# Altium PCB GWC-MCU-002-A.PcbDoc (part 2 of 2)
Units mm, origin at the board's own origin, x right, y up, seen from the top; angles counter-clockwise.
Board outline 121 x 53 mm, 2 copper layers (Top Layer, Bottom Layer), stack 1.601 mm thick; 192 components, 111 nets, 570 pads, 192 vias.
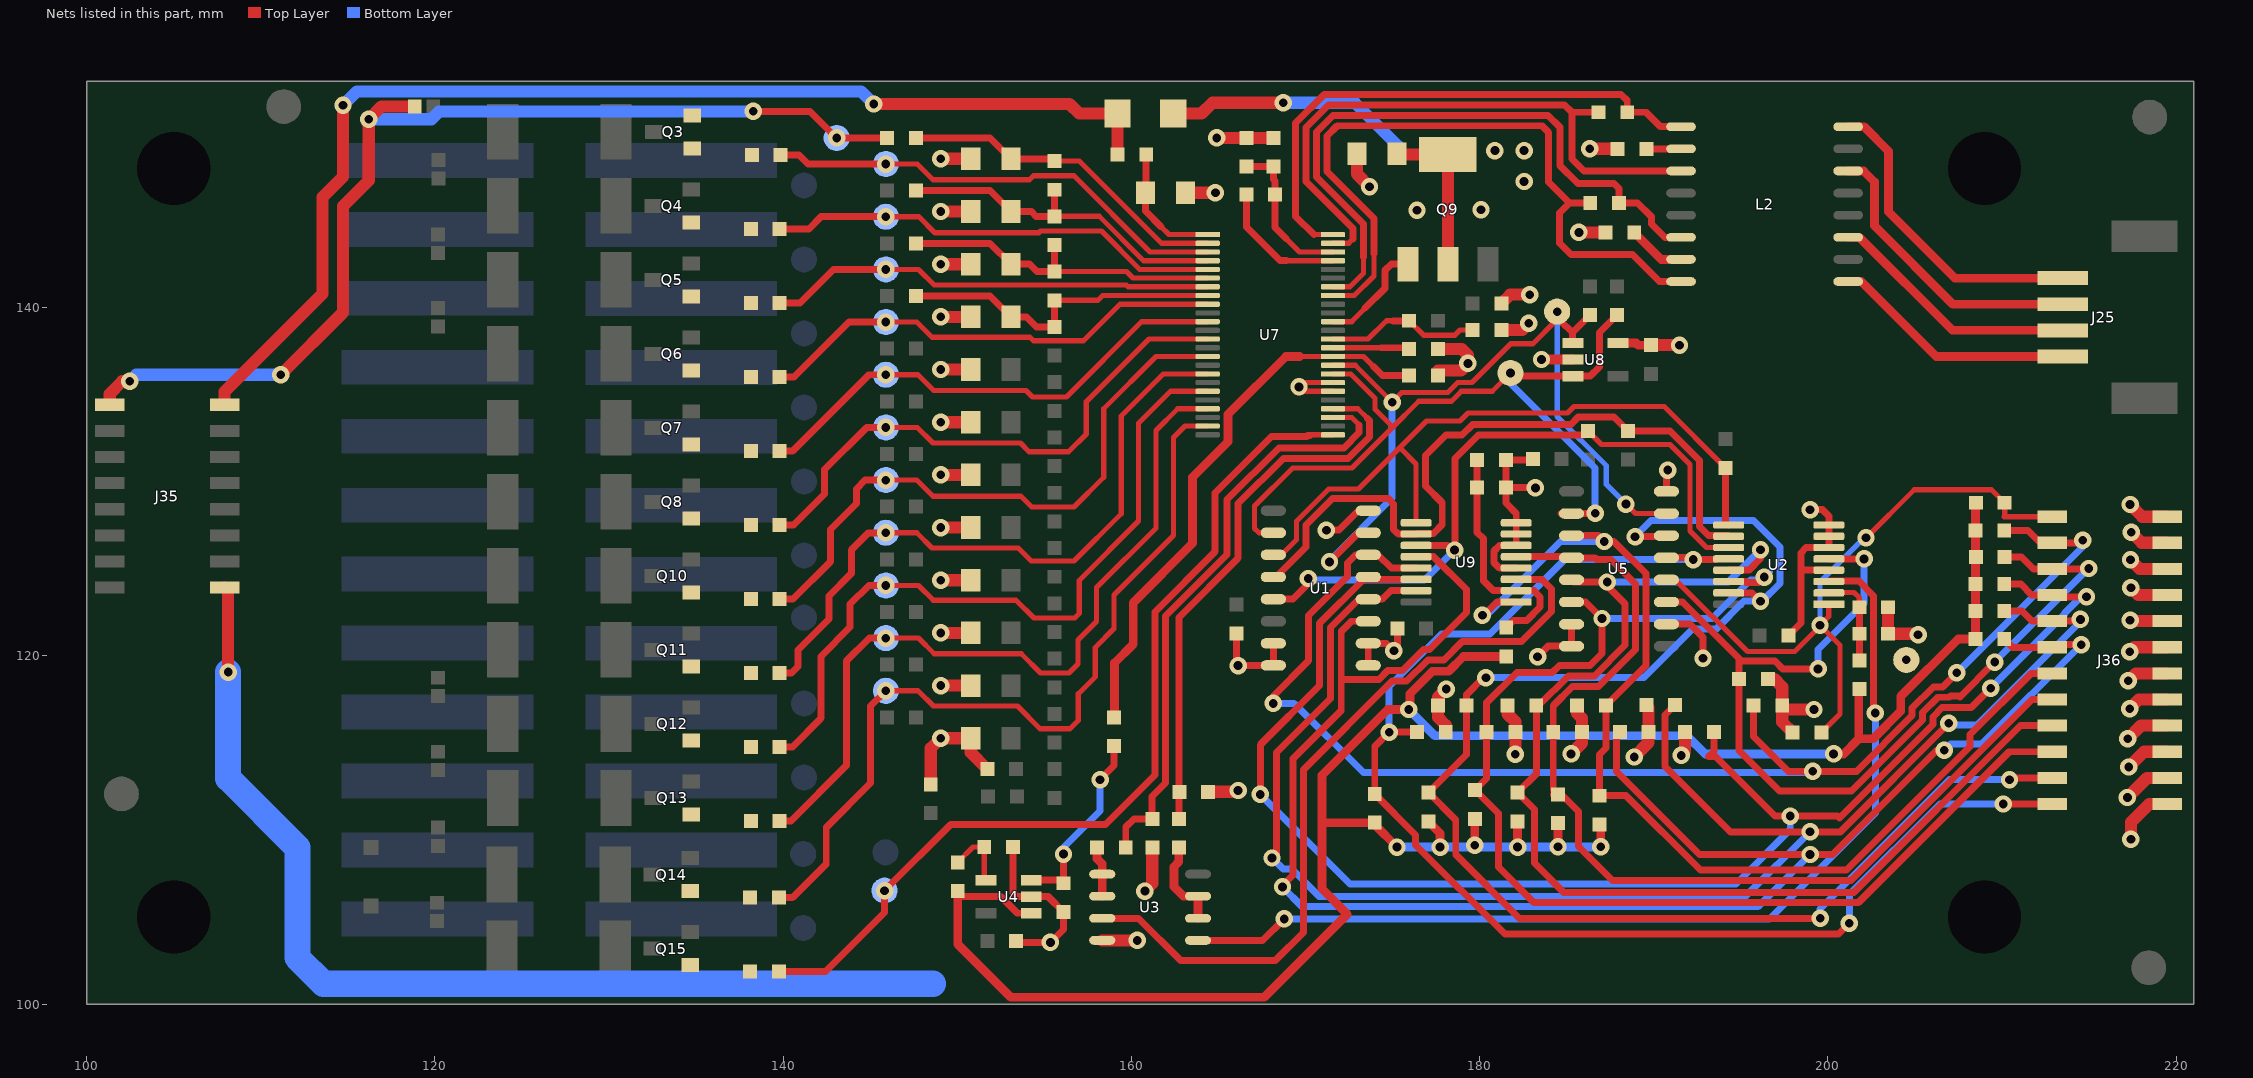
[diagram p2: the nets of this part, all layers, seen from the top]

## Via types
v1: diameter 1, hole 0.5, Top Layer to Bottom Layer, 192 vias

## Nets (pads, with @x,y where several pads share a name; then routed paths per layer and width w, separated by ;. In a path a pad name is that pad's centre, name@x,y a point inside that pad or via, vN(x,y) a via of type N, cw(c..) or ccw(c..) an arc to the next point about the centre after c; other vN are vias at no path point) (continued)
CELL9_AI_V_MX: C14.1 C15.2 C27.2 R33.2 U7.8 | length 19.1
  Top Layer w0.3: C14.1@155.575,140.425 158.075,140.425 158.35,140.7 U7.8@164.375,140.7
  Top Layer w0.4: R33.2@147.625,140.675 151.875,140.675 C27.2@153.075,139.475 153.975,139.475 154.55,138.9 C15.2@155.575,138.9 C14.1@155.575,140.425
CELL10_AI_V_MX: C13.1 C14.2 C24.2 R29.2 U7.6 | length 19.1
  Top Layer w0.3: C14.2@155.575,142.075 159.725,142.075 160.1,141.7 U7.6@164.375,141.7
  Top Layer w0.4: R29.2@147.625,143.7 151.875,143.7 C24.2@153.075,142.5 154.15,142.5 154.575,142.075 C14.2@155.575,142.075 C13.1@155.575,143.6
CELL11_AI_V_MX: C12.1 C13.2 C23.2 R25.2 U7.4 | length 19.9
  Top Layer w0.3: C13.2@155.575,145.25 158.15,145.25 160.7,142.7 U7.4@164.375,142.7
  Top Layer w0.4: R25.2@147.625,146.725 151.875,146.725 C23.2@153.075,145.525 154.25,145.525 154.525,145.25 C13.2@155.575,145.25 C12.1@155.575,146.775
CELL12_AI_V_IB: B12.1 J27.1 J35.2 Q3.S R21.1 | length 61.2
  Top Layer w0.4: v1(138.275,151.275) 141.55,151.275 v1(143.075,149.75) R21.1@145.975,149.75
  Top Layer w0.7: J35.2@101.325,134.425 101.325,135.05 102.05,135.775 v1(102.475,135.775) ; v1(111.15,136.15) 114.725,139.725 114.725,145.825 116.2,147.3 v1(116.2,150.825) 116.925,151.55 J27.1@118.845,151.55
  Bottom Layer w0.7: v1(102.475,135.775) 102.85,136.15 v1(111.15,136.15) ; v1(116.2,150.825) 119.8,150.825 120.25,151.275 v1(138.275,151.275)
CELL12_AI_V_MX: C12.2 C22.2 R21.2 U7.2 | length 19.3
  Top Layer w0.3: C12.2@155.575,148.425 157,148.425 161.725,143.7 U7.2@164.375,143.7
  Top Layer w0.4: R21.2@147.625,149.75 151.875,149.75 C22.2@153.075,148.55 155.45,148.55 C12.2@155.575,148.425
CELL12_POWER: J35.1 R18.2 R35.1 | length 67.7
  Top Layer w0.7: J35.1@107.925,134.425 107.925,135.175 113.55,140.8 113.55,146.35 114.725,147.525 v1(114.725,151.625) ; v1(145.2,151.7) 156.45,151.7 157,151.15 R35.1@159.2,151.15 R18.2@159.2,148.8
  Bottom Layer w0.7: v1(114.725,151.625) 115.525,152.425 144.475,152.425 v1(145.2,151.7)
DC1_DO_V_DX: F1.1 R88.2 U7.25 | length 52.8
  Top Layer w0.3: 170.2,132.65 170.25,132.7 U7.25@171.575,132.7
  Top Layer w0.4: R88.2@139.75,101.875 142.425,101.875 145.825,105.275 v1(145.825,106.525) 149.625,110.325 158.5,110.325 161.35,113.175 161.35,122.536 164.801,125.987 164.801,129.351 168.05,132.6 170.074,132.6 170.124,132.65 170.2,132.65 170.25,132.65
DC2_DO_V_DX: F2.1 R83.2 U7.23 | length 47.8
  Top Layer w0.3: v1(145.9,118) 147.75,118 148.625,117.125 153.45,117.125 154.75,115.825 156.475,115.825 156.95,116.3 156.95,117.825 157.925,118.8 157.925,120.495 159,121.57 159,123.509 162.412,126.922 162.412,132.538 163.075,133.2 U7.23@164.375,133.2
  Top Layer w0.4: R83.2@139.75,106.125 140.55,106.125 142.475,108.05 142.475,110.15 145.025,112.7 145.025,117.125 v1(145.9,118)
DC3_DO_V_DX: F3.1 R79.2 U7.21 | length 44.8
  Top Layer w0.3: v1(145.9,121.025) 147.775,121.025 148.675,120.125 153.675,120.125 154.775,119.025 156.418,119.025 156.925,119.532 156.925,120.909 158,121.984 158,123.923 161.412,127.336 161.412,132.952 162.661,134.2 U7.21@164.375,134.2
  Top Layer w0.4: R79.2@139.8,110.525 140.45,110.525 143.625,113.7 143.625,119.7 144.95,121.025 v1(145.9,121.025)
DC4_DO_V_DX: F4.1 R72.2 U7.19 | length 41.9
  Top Layer w0.3: v1(145.9,124.05) 147.775,124.05 148.625,123.2 153.375,123.2 154.4,122.175 156.743,122.175 157,122.432 157,124.338 160.412,127.75 160.412,133.366 162.246,135.2 U7.19@164.375,135.2
  Top Layer w0.4: R72.2@139.8,114.775 140.525,114.775 142.175,116.425 142.175,119.978 143.85,121.653 143.85,122.975 144.925,124.05 v1(145.9,124.05)
DC5_DO_V_DX: F5.1 R62.2 U7.17 | length 38.4
  Top Layer w0.3: v1(145.9,127.075) 147.675,127.075 148.55,126.2 153.5,126.2 154.25,125.45 156.698,125.45 159.412,128.164 159.412,133.78 161.832,136.2 U7.17@164.375,136.2
  Top Layer w0.4: R62.2@139.8,119.025 140.475,119.025 140.85,119.4 140.85,120.35 142.625,122.125 142.625,123.447 143.913,124.735 143.913,126.088 144.9,127.075 v1(145.9,127.075)
DC6_DO_V_DX: F6.1 R56.2 U7.15 | length 35.5
  Top Layer w0.3: v1(145.9,130.1) 147.675,130.1 148.6,129.175 153.65,129.175 154.275,128.55 156.7,128.55 158.413,130.263 158.413,134.195 161.418,137.2 U7.15@164.375,137.2
  Top Layer w0.4: R56.2@139.8,123.275 140.575,123.275 142.713,125.413 142.713,127.263 144.2,128.75 144.2,129.6 144.7,130.1 v1(145.9,130.1)
DC7_DO_V_DX: F7.1 R49.2 U7.13 | length 32.8
  Top Layer w0.3: v1(145.9,133.125) 147.7,133.125 148.6,132.225 153.625,132.225 154.125,131.725 156.393,131.725 157.413,132.745 157.413,134.609 161.004,138.2 U7.13@164.375,138.2
  Top Layer w0.4: R49.2@139.8,127.525 140.6,127.525 142.375,129.3 142.375,130.7 144.8,133.125 v1(145.9,133.125) 145.175,133.125
DC8_DO_V_DX: F8.1 R45.2 U7.11 | length 28.7
  Top Layer w0.3: v1(145.9,136.15) 147.75,136.15 148.65,135.25 153.95,135.25 154.325,134.875 156.264,134.875 160.589,139.2 U7.11@164.375,139.2
  Top Layer w0.4: R45.2@139.8,131.775 140.55,131.775 144.925,136.15 v1(145.9,136.15)
DC9_DO_V_DX: F9.1 R39.2 U7.9 | length 27.2
  Top Layer w0.3: v1(145.9,139.175) 147.675,139.175 148.55,138.3 154.175,138.3 154.375,138.1 157.25,138.1 159.35,140.2 U7.9@164.375,140.2
  Top Layer w0.4: R39.2@139.8,136.025 140.625,136.025 143.775,139.175 v1(145.9,139.175)
DC10_DO_V_DX: F10.1 R32.2 U7.7 | length 25.8
  Top Layer w0.3: v1(145.9,142.2) 147.775,142.2 148.675,141.3 159.7,141.3 159.8,141.2 U7.7@164.375,141.2
  Top Layer w0.4: R32.2@139.8,140.275 140.975,140.275 142.9,142.2 v1(145.9,142.2)
DC11_DO_V_DX: F11.1 R28.2 U7.5 | length 26.2
  Top Layer w0.3: v1(145.9,145.225) 147.8,145.225 148.725,144.3 154.675,144.3 154.775,144.4 158.275,144.4 160.475,142.2 U7.5@164.375,142.2
  Top Layer w0.4: R28.2@139.8,144.525 141.475,144.525 142.175,145.225 v1(145.9,145.225)
DC12_DO_V_DX: F12.1 R24.2 U7.3 | length 27
  Top Layer w0.3: v1(145.9,148.25) 147.7,148.25 148.6,147.35 154.15,147.35 154.375,147.575 156.7,147.575 161.075,143.2 U7.3@164.375,143.2
  Top Layer w0.4: R24.2@139.85,148.775 140.9,148.775 141.425,148.25 v1(145.9,148.25)
GND: C1.1 C2.1 C3.1 C4.1 C5.1 C6.1 C7.1 C8.1 C9.2 C10.2 C11.1 C21.2 C22.1 C23.1 C24.1 C25.1 C26.1 C27.1 C28.1 C29.1 C30.1 C31.1 C33.2 C35.1 C36.1 C37.1 C38.1 C39.1 C40.2 C41.1 C42.1 C43.1 C44.1 C45.1 C46.1 C47.1 C48.1 C49.2 C50.1 C51.1 C53.2 C54.2 C55.2 GND.1 J35.15 J36.2 J36.4 J36.6 J36.8 J36.10 J36.12 J36.14 J36.16 J36.18 J36.20 J36.22 J36.24 R3.1 R4.1 R7.1 R14.1 R19.2 R20.2 R60.1 U1.7 U1.8 U1.9 U1.10 U1.16 U2.4 U2.6 U2.7 U2.8 U3.4 U4.2 U5.7 U5.8 U5.10 U5.16 U7.30 U7.31 U8.2 U8.5 U9.4 U9.6 U9.7 U9.8 | length 227.2
  Top Layer w0.3: U7.30@171.575,135.2 169.875,135.2 v1(169.625,135.45) 169.875,135.7 U7.31@171.575,135.7
  Top Layer w0.4: R19.2@153.2,109.025 153.2,106.375 153.4,106.175 U4.2@154.25,106.175 155.225,106.175 C53.2@156.1,105.3 156.1,104.3 v1(155.35,103.55) 153.45,103.55 C54.2@153.375,103.625 ; C55.2@166.025,121.3 166.025,119.56 v1@166.13,119.455 ; v1(166.125,119.45) v1@166.13,119.455 ; U1.7@168.15,120.725 U1.8@168.15,119.455 v1@166.13,119.455 ; v1(171.2,127.225) 171.914,127.225 173.034,128.345 U1.16@173.6,128.345 ; U1.9@173.6,119.455 U1.10@173.6,120.725 174.65,120.725 v1(175.075,120.3) 175.275,120.5 C40.2@175.275,121.575 ; U9.4@182.1,125.05 181.125,125.05 180.81,125.365 180.81,126.014 181.146,126.35 U9.6@182.1,126.35 U9.7@182.1,127 U9.8@182.1,127.65 182.1,128.175 181.5,128.775 C1.1@181.5,129.675 ; C21.2@183,131.25 R14.1@181.5,131.25 C1.1@181.5,129.675 ; v1(183.2,129.65) 183.175,129.675 C1.1@181.5,129.675 ; v1(183.325,119.95) 183.935,120.56 U5.8@185.275,120.56 U5.7@185.275,121.83 ; U5.10@190.725,121.83 192.07,121.83 192.825,121.075 v1(192.825,119.875) ; U5.16@190.725,129.45 190.725,130.6 v1(190.8,130.675) ; C9.2@197.725,121.175 198.45,121.9 198.45,125.925 198.75,126.225 U2.6@200.05,126.225 U2.7@200.05,126.875 U2.8@200.05,127.525 200.05,128.025 199.675,128.4 v1(198.975,128.4) ; 198.45,124.925 U2.4@200.05,124.925
  Top Layer w0.5: U8.5@187.95,137.975 188.975,137.975 189.1,137.85 C33.2@189.85,137.85
  Top Layer w0.6: v1(183.55,137.025) U8.2@185.35,137.025
  Top Layer w0.7: J35.15@107.925,123.925 108.125,123.725 v1(108.125,119.075) ; R20.2@148.475,112.625 148.475,114.7 v1(149.05,115.275) C50.1@150.775,115.275 150.775,114.45 C51.1@151.725,113.5 ; v1(149.05,118.3) C48.1@150.775,118.3 ; v1(149.05,121.325) C41.1@150.775,121.325 ; v1(149.05,124.35) C39.1@150.775,124.35 ; v1(149.05,127.375) C38.1@150.775,127.375 ; v1(149.05,130.4) C31.1@150.775,130.4 ; v1(149.05,133.425) C29.1@150.775,133.425 ; v1(149.05,136.45) C28.1@150.775,136.45 ; v1(149.05,139.475) C27.1@150.775,139.475 ; v1(149.05,142.5) C24.1@150.775,142.5 ; v1(149.05,145.525) C23.1@150.775,145.525 ; v1(149.05,148.55) C22.1@150.775,148.55 ; U3.4@158.325,103.665 v1(160.34,103.665) ; v1(160.775,106.5) 161.2,106.925 C49.2@161.2,109 ; C11.1@163.1,146.6 v1(164.825,146.6) ; C10.2@164.4,112.2 166.05,112.2 v1(166.125,112.275) ; v1(164.9,149.75) R3.1@166.6,149.75 R4.1@168.15,149.75 ; C30.1@172.95,148.85 172.95,147.675 v1(173.675,146.95) ; C35.1@177.6,136.1 177.6,136.4 178.925,136.4 v1(179.325,136.8) 179.325,137.275 178.975,137.625 C36.1@177.6,137.625 ; C43.1@178.05,115.625 178.05,116.025 177.6,116.475 C44.1@177.6,117.15 177.6,117.625 v1(178.075,118.1) ; R60.1@181.25,138.725 182.45,138.725 v1(182.825,139.1) ; C37.1@181.25,140.25 181.75,140.75 v1(182.875,140.75) ; C46.1@181.6,117.15 181.6,116.675 182.05,116.225 C45.1@182.05,115.625 v1(182.05,114.35) ; v1(185.25,114.375) 185.875,115 C47.1@185.875,115.625 185.875,116.425 185.6,116.7 C3.1@185.6,117.15 ; v1(185.7,144.325) C26.1@187.225,144.325 ; v1(186.325,149.125) C25.1@187.925,149.125 ; v1(188.875,114.2) 189.7,115.025 C4.1@189.7,115.625 189.7,117.05 C5.1@189.575,117.175 ; C33.2@189.85,137.85 v1(191.475,137.85) ; v1(191.575,114.289) 191.8,114.514 C6.1@191.8,115.625 ; C2.1@196.55,118.675 196.925,118.675 197.375,118.225 C7.1@197.375,117.15 ; C42.1@197.975,115.6 197.375,116.2 C7.1@197.375,117.15 ; v1(199.2,116.925) 197.6,116.925 C7.1@197.375,117.15 ; R7.1@203.45,122.8 C8.1@203.45,121.275 205.125,121.275 v1(205.175,121.225) ; v1(217.2,111.875) 218.325,113 J36.4@219.475,113 ; v1(217.225,115.25) 217.975,116 J36.8@219.475,116 ; v1(217.25,118.575) 217.675,119 J36.12@219.475,119 ; v1(217.275,113.625) 218.15,114.5 J36.6@219.475,114.5 ; v1(217.325,116.975) 217.85,117.5 J36.10@219.475,117.5 ; v1(217.325,120.25) 217.575,120.5 J36.14@219.475,120.5 ; v1(217.35,122.05) 217.4,122 J36.16@219.475,122 ; v1(217.35,128.7) 218.05,128 J36.24@219.475,128 ; v1(217.375,125.525) 217.9,125 J36.20@219.475,125 ; v1(217.4,109.475) 217.4,110.45 218.45,111.5 J36.2@219.475,111.5 ; v1(217.4,123.925) 217.825,123.5 J36.18@219.475,123.5 ; v1(217.425,127.1) 218.025,126.5 J36.22@219.475,126.5
  Bottom Layer w0.4: v1(175.075,120.3) v1@175.1,120.3 ; v1(198.975,128.4) 199.05,128.4 v1@199.225,128.225
  Bottom Layer w1.5: v1(108.125,119.075) 108.125,112.975 112.1,109 112.1,102.675 113.6,101.175 148.6,101.175
  other v1: 204.5,119.775
IMA: J25.1 L2.1 | length 14.1
  Top Layer w0.5: L2.1@201.162,141.504 201.921,141.504 206.225,137.2 J25.1@213.475,137.2
IMB: J25.3 L2.6 | length 17
  Top Layer w0.5: L2.6@201.162,147.854 202.046,147.854 202.675,147.225 202.675,144.7 207.175,140.2 J25.3@213.475,140.2
IPA: J25.2 L2.3 | length 14.5
  Top Layer w0.5: L2.3@201.162,144.044 201.806,144.044 207.15,138.7 J25.2@213.475,138.7
IPB: J25.4 L2.8 | length 17.9
  Top Layer w0.5: L2.8@201.162,150.394 202.081,150.394 203.483,148.992 203.483,145.517 207.3,141.7 J25.4@213.475,141.7
NetC1_2: C1.2 R1.1 R14.2 U9.2 | length 13.8
  Top Layer w0.4: R14.2@179.85,131.25 C1.2@179.85,129.675 179.85,127.102 180.21,126.742 180.21,124.319 180.779,123.75 U9.2@182.1,123.75 183.116,123.75 183.475,123.391 183.475,122.809 182.716,122.05 181.95,122.05 R1.1@181.525,121.625
NetC8_2: C8.2 R7.2 R13.1 U2.2 | length 6.1
  Top Layer w0.3: U2.2@199.375,123.65 201.5,123.65 201.8,123.35 R7.2@201.8,122.8
  Top Layer w0.4: R13.1@201.8,119.75 C8.2@201.8,121.275 R7.2@201.8,122.8
NetC11_2: C11.2 R18.1 U7.1 | length 7.4
  Top Layer w0.3: 161.7,144.65 162.15,144.2 U7.1@164.375,144.2
  Top Layer w0.4: R18.1@160.85,148.8 160.85,146.65 C11.2@160.8,146.6 160.8,145.55 161.7,144.65
NetC25_2: C25.2 L2.10 | length 2
  Top Layer w0.4: C25.2@189.575,149.125 L2.10@191.561,149.125
NetC26_2: C26.2 L2.15 | length 3.3
  Top Layer w0.5: C26.2@188.876,144.324 190.426,142.774 L2.15@191.562,142.774
NetC30_2: C30.2 Q9.C R35.2 | length 23.5
  Top Layer w0.7: R35.2@162.4,151.15 164.025,151.15 164.65,151.775 v1(168.725,151.775) ; C30.2@175.225,148.8 Q9.C@178.175,148.8 Q9.C@178.175,142.5
  Bottom Layer w0.7: v1(168.725,151.775) 172.825,151.775 175.325,149.275
  other v1: 176.4,145.6 180.075,145.625 182.55,147.25 180.875,149.025 182.55,149.025
NetC53_1: C53.1 R16.2 U4.3 | length 11
  Top Layer w0.4: U4.3@154.25,107.125 155.925,107.125 C53.1@156.1,106.95 v1(156.1,108.625) ; v1(158.2,112.9) 159,113.7 R16.2@159,114.825
  Bottom Layer w0.4: v1(156.1,108.625) 156.1,109 158.2,111.1 v1(158.2,112.9)
NetL2_9: L2.9 R36.1 U7.48 | length 31.9
  Top Layer w0.3: 170.475,144.2 U7.48@171.575,144.2
  Top Layer w0.4: 170.475,144.2 169.425,145.25 169.425,150.6 171.075,152.25 188.125,152.25 188.475,151.9 R36.1@188.475,151.225 189.55,151.225 190.381,150.394 L2.9@191.562,150.394
NetL2_11: L2.11 R36.2 U7.47 | length 35.5
  Top Layer w0.3: U7.47@171.575,143.7 172.475,143.7 172.725,143.95
  Top Layer w0.4: 172.725,143.95 172.725,144.55 170.025,147.25 170.025,150.351 171.324,151.65 184.875,151.65 185.3,151.225 ; R36.2@186.825,151.225 185.3,151.225 ; L2.11@191.562,147.854 185.996,147.854 185.3,148.55 185.3,151.225
NetL2_14: L2.14 R37.1 U7.42 | length 37.6
  Top Layer w0.3: U7.42@171.575,141.2 172.55,141.2 173.325,141.975 173.325,142.925
  Top Layer w0.4: 173.325,142.925 173.325,144.799 170.625,147.499 170.625,150.103 171.572,151.05 183.925,151.05 184.6,150.375 184.6,148.175 185.65,147.125 187.725,147.125 188,146.85 R37.1@188,146.025 189.075,146.025 189.875,145.225 189.875,144.8 190.631,144.044 L2.14@191.562,144.044
NetL2_16: L2.16 R37.2 U7.41 | length 41.3
  Top Layer w0.3: U7.41@171.575,140.7 172.8,140.7 173.925,141.825 173.925,143.1
  Top Layer w0.4: 173.925,143.1 173.925,145.125 171.225,147.825 171.225,149.854 171.821,150.45 183.575,150.45 183.95,150.075 183.95,147.225 185.15,146.025 ; R37.2@186.35,146.025 185.15,146.025 ; L2.16@191.562,141.504 190.325,141.504 188.779,143.05 185.25,143.05 184.575,143.725 184.575,145.45 185.15,146.025
NetQ3_G: Q3.G R24.1
NetQ4_G: Q4.G R28.1
NetQ5_G: Q5.G R32.1
NetQ6_G: Q6.G R39.1
NetQ7_G: Q7.G R45.1
NetQ8_G: Q8.G R49.1
NetQ9_B: Q9.B U7.38 | length 6.3
  Top Layer w0.3: U7.38@171.575,139.2 172.65,139.2 173.425,139.975
  Top Layer w0.4: 173.425,139.975 174.55,141.1 174.55,142.125 174.925,142.5 Q9.B@175.875,142.5
NetQ10_G: Q10.G R56.1
NetQ11_G: Q11.G R62.1
NetQ12_G: Q12.G R72.1
NetQ13_G: Q13.G R79.1
NetQ14_G: Q14.G R83.1
NetQ15_G: Q15.G R88.1
NetR3_2: R3.2 R4.2 R42.2 U7.46 | length 9
  Top Layer w0.3: 168.875,143.975 169.65,143.2 U7.46@171.575,143.2
  Top Layer w0.4: R3.2@166.6,148.1 R4.2@168.15,148.1 168.15,147.375 168.25,147.275 R42.2@168.25,146.5 168.25,144.6 168.875,143.975
NetR15_2: R15.2 U1.5 U2.11 U9.11 | length 40.8
  Top Layer w0.3: R15.2@186.225,132.925 187,132.15 190.925,132.15 192.075,131 192.075,127.175 193.025,126.225 U2.11@194.3,126.225
  Top Layer w0.4: U1.5@168.15,123.265 169.282,123.265 170.15,124.133 v1(170.15,124.45) ; U9.11@176.35,126.35 178.153,126.35 178.421,126.081 v1(178.559,126.081) ; v1@178.575,126.081 178.575,131.341 179.934,132.7 186,132.7 R15.2@186.225,132.925
  Bottom Layer w0.4: v1(170.15,124.45) 170.235,124.365 176.843,124.365 v1(178.559,126.081)
NetR17_2: R17.2 U3.6 U3.7 | length 5.2
  Top Layer w0.5: R17.2@162.725,109 162.725,108.175 162.45,107.9 162.45,106.75 162.995,106.205 U3.7@163.825,106.205 U3.6@163.825,104.935
NetR19_1: R19.1 R23.1 U4.4 | length 3.8
  Top Layer w0.3: R23.1@150.025,108.15 150.9,109.025 R19.1@151.55,109.025 151.55,107.225 U4.4@151.65,107.125
NetR42_1: R42.1 U7.45 | length 7.6
  Top Layer w0.3: 168.9,142.7 U7.45@171.575,142.7
  Top Layer w0.4: R42.1@166.6,146.5 166.6,144.625 168.525,142.7 168.9,142.7
NetR53_2: R53.2 R60.2 U7.36 | length 8.9
  Top Layer w0.3: U7.36@171.575,138.2 173.593,138.2 174.643,139.25 175.025,139.25 ; R53.2@175.95,139.25 176.775,138.425 178.575,138.425 178.875,138.725 R60.2@179.6,138.725
  Top Layer w0.4: 175.025,139.25 R53.2@175.95,139.25
NetR76_2: R76.2 U1.4 U2.10 U9.10 | length 42
  Top Layer w0.4: U1.4@168.15,124.535 168.295,124.535 170.025,126.265 170.025,127.514 171.556,129.045 174.755,129.045 175.06,128.74 175.06,127.265 175.325,127 U9.10@176.35,127 176.39,127.04 177.344,127.04 177.85,127.546 177.85,128.8 176.9,129.75 176.9,131.525 178.063,132.688 178.988,132.688 179.6,133.3 185.234,133.3 185.659,133.725 187.725,133.725 R76.2@188.525,132.925 190.928,132.925 192.625,131.228 192.625,127.425 193.135,126.915 194.26,126.915 U2.10@194.3,126.875
NetR77_1: R77.1 U1.3 U2.9 U9.9 | length 39.6
  Top Layer w0.3: U1.3@168.15,125.805 168.605,125.805 169.475,126.675 169.475,127.742 171.328,129.595 173.045,129.595 176.95,133.5 178.875,133.5 179.325,133.95 185.036,133.95 185.411,134.325 190.6,134.325 R77.1@194.125,130.8 ; 175.438,131.938 176.35,131.025 U9.9@176.35,127.65
  Top Layer w0.4: R77.1@194.125,130.8 194.125,127.7 U2.9@194.3,127.525
NetR85_2: R85.2 U3.1 U3.2 | length 2.9
  Top Layer w0.5: R85.2@158.025,109 158.025,108.35 158.325,108.05 U3.1@158.325,107.475 U3.2@158.325,106.205
NetU2_3: U2.3 U3.5 | length 57.4
  Top Layer w0.4: U3.5@163.825,103.665 167.54,103.665 v1(168.775,104.9) ; U2.3@200.05,124.3 201.775,124.3 202.625,123.45 202.625,116.825 v1(202.725,116.725)
  Bottom Layer w0.4: v1(168.775,104.9) 196.653,104.9 202.725,110.972 v1(202.725,116.725)
NetU3_3: U3.3 U9.3 | length 44.1
  Top Layer w0.4: U3.3@158.325,104.935 160.415,104.935 162.825,102.525 168.275,102.525 169.875,104.125 169.875,113.467 174.968,118.56 175.806,118.56 177.021,119.775 177.95,119.775 179,120.825 182.4,120.825 184.125,122.55 184.125,123.85 183.575,124.4 U9.3@182.1,124.4
SCL: R6.1 SCL.1 U1.15 U5.15 U7.33 U8.1 | length 47.9
  Top Layer w0.3: U7.33@171.575,136.7 172.85,136.7 v1(174.975,134.575) 175.525,135.125 178.165,135.125 178.74,135.7 179.55,135.7 181.775,137.925 183.05,137.925 184.45,139.325 v1(184.45,139.775) ; v1(188.4,128.725) 188.945,128.18 U5.15@190.725,128.18
  Top Layer w0.4: v1(171.375,125.4) 173.05,127.075 U1.15@173.6,127.075 ; SCL.1@184.651,139.249 185.325,138.575 ; U8.1@185.325,138 185.325,138.575 ; R6.1@186.325,139.575 185.325,138.575
  Bottom Layer w0.3: v1(184.45,139.775) 184.45,133.753 187.275,130.928 187.275,129.85 v1(188.4,128.725)
  Bottom Layer w0.4: v1(171.375,125.4) 171.375,125.461 174.975,129.061 v1(174.975,134.575)
SDA: R5.1 SDA.1 U1.2 U5.2 U7.32 U8.3 | length 46.6
  Top Layer w0.3: U1.2@168.475,127.075 167.325,127.075 167.075,127.325 167.075,128.614 169.261,130.8 172.673,130.8 174.962,133.088 ; U7.32@171.575,136.2 172.593,136.2 173.99,134.803 173.99,134.167 174.962,133.195 174.962,133.088 ; v1(181.775,136.25) 180.725,135.2 178.947,135.2 178.372,134.625 176.498,134.625 174.962,133.088
  Top Layer w0.4: v1(181.775,136.25) 181.95,136.075 183.943,136.075 U8.3@185.35,136.075 186.35,136.075 186.875,136.6 186.875,138.575 R5.1@187.875,139.575 ; U5.2@184.675,128.195 v1(186.63,128.195)
  Bottom Layer w0.4: v1(181.775,136.25) 181.775,135.65 186.63,130.795 v1(186.63,128.195)
TEMP1_AI_C_MX: C49.1 R85.1 U7.27 | length 34.3
  Top Layer w0.3: U7.27@171.575,133.7 172.65,133.7 173.075,133.275
  Top Layer w0.4: R85.1@159.675,109 159.675,110.175 160.15,110.65 C49.1@161.2,110.65 161.175,110.675 161.175,111.925 161.95,112.7 161.95,122.287 165.501,125.838 165.501,128.976 168.475,131.95 172.197,131.95 173.075,132.828 173.075,133.275
TEMP2_AI_C_MX: C10.1 R17.1 U7.28 | length 32
  Top Layer w0.3: U7.28@171.575,134.2 173.001,134.2 173.551,133.65
  Top Layer w0.4: R17.1@162.725,110.65 162.725,122.214 166.125,125.614 166.125,128.751 168.724,131.35 172.445,131.35 173.675,132.58 173.675,133.526 173.551,133.65
TEMPA_AI_C_IB: C7.2 J36.21 R12.1 U1.14 U9.13 | length 79.3
  Top Layer w0.4: v1(168.15,117.275) 168.15,117.7 170.175,119.725 170.175,122.325 172.41,124.56 172.41,125.335 172.88,125.805 U1.14@173.6,125.805 174.17,125.805 174.925,125.05 U9.13@176.35,125.05 ; C7.2@195.725,117.15 195.725,115.375 197.725,113.375 v1(199.125,113.375) 201.638,113.375 204.835,116.572 204.835,117.001 206.065,118.231 206.593,118.231 v1(207.4,119.037) ; R12.1@210.125,127.2 211.5,127.2 212.2,126.5 J36.21@212.875,126.5 214.475,126.5 v1(214.625,126.65)
  Bottom Layer w0.4: v1(168.15,117.275) 169.35,117.275 173.325,113.3 199.05,113.3 v1(199.125,113.375) ; v1(207.4,119.037) 214.625,126.262 v1(214.625,126.65)
TEMPB_AI_C_IB: C6.2 J36.17 R11.1 U1.13 U9.14 | length 87.7
  Top Layer w0.4: v1(167.4,112.05) 167.4,114.9 170.8,118.3 170.8,121.88 173.32,124.4 U9.14@176.35,124.4 ; C6.2@193.45,115.625 193.45,114.525 193.15,114.225 193.55,114.225 196.97,110.805 v1(197.835,110.805) 200.554,110.805 200.66,110.7 206.035,116.075 206.035,116.503 206.562,117.031 208.231,117.031 v1(209.35,118.15) ; R11.1@210.125,124.125 211.075,124.125 211.7,123.5 J36.17@212.875,123.5 212.975,123.4 v1(214.85,123.4)
  Bottom Layer w0.4: v1(167.4,112.05) 172.544,106.906 194.708,106.906 197.835,110.032 v1(197.835,110.805) ; v1(209.35,118.15) 213.6,122.4 213.6,122.473 214.527,123.4 v1(214.85,123.4)
TEMPC_AI_C_IB: C5.2 J36.15 R10.1 U1.12 U9.15 | length 92.6
  Top Layer w0.4: v1(168.075,108.4) 168.335,108.66 168.335,114.46 171.425,117.55 171.425,121.624 173.066,123.265 U1.12@173.6,123.265 174.415,123.265 174.9,123.75 U9.15@176.35,123.75 ; C5.2@191.225,117.175 190.65,116.6 190.65,113.65 194.4,109.9 v1(198.975,109.9) 200.708,109.9 206.935,116.127 v1(206.935,116.131) ; R10.1@210.125,122.575 211.15,122.575 211.725,122 J36.15@212.875,122 214.4,122 v1(214.5,122.1)
  Bottom Layer w0.4: v1(168.075,108.4) 168.72,107.755 169.22,107.755 170.775,106.2 195.275,106.2 v1(198.975,109.9) ; v1@207.045,116.03 208.555,116.03 214.5,121.975 v1(214.5,122.1)
TEMPD_AI_C_IB: C4.2 J36.13 R9.1 U1.11 U9.12 | length 103.8
  Top Layer w0.4: v1(168.675,106.738) 168.675,106.825 169.275,107.425 169.275,114.1 172.05,116.875 172.05,118.65 ; U1.11@173.6,121.995 172.645,121.995 172.05,121.4 172.05,118.65 ; U9.12@176.35,125.7 177.35,125.7 179.244,123.806 179.244,122.502 177.116,120.375 176.772,120.375 175.557,119.16 174.72,119.16 174.21,118.65 172.05,118.65 ; C4.2@188.05,115.625 187.85,115.425 187.85,113.375 192.625,108.6 v1(198.975,108.6) 200.257,108.6 206.24,114.583 v1(206.675,114.583) ; R9.1@210.125,120.975 210.6,120.5 J36.13@212.875,120.5 213.025,120.65 v1(214.55,120.65)
  Bottom Layer w0.4: v1(168.675,106.738) 169.813,105.6 195.975,105.6 v1(198.975,108.6) ; 207.05,114.958 208.858,114.958 v1(214.55,120.65)
TEMPE_AI_C_IB: C3.2 J36.11 R8.1 U5.3 U9.1 | length 62.9
  Top Layer w0.4: v1(180.159,122.331) 180.261,122.331 180.267,122.325 180.316,122.374 180.316,122.416 181,123.1 U9.1@182.1,123.1 ; U5.3@185.275,126.91 186.815,126.91 v1(187.15,126.575) 187.7,126.575 189.55,124.725 189.55,119.45 C3.2@187.25,117.15 187.25,114.725 186.875,114.35 R8.1@186.875,111.975 188.401,111.975 192.676,107.7 201.065,107.7 208.17,114.805 208.17,115.495 211.675,119 212.365,119 J36.11@212.875,119
  Bottom Layer w0.4: v1(180.159,122.331) 180.397,122.331 180.403,122.325 184.653,126.575 v1(187.15,126.575)
TEMPF_AI_C_IB: C47.2 J36.9 R70.1 U5.4 U9.5 | length 58.4
  Top Layer w0.4: U9.5@182.1,125.7 U5.4@185.215,125.7 ; R70.1@184.225,112.025 R70.1@184.225,112.05 ; U5.4@185.275,125.64 186.621,125.64 186.721,125.54 187.535,125.54 188.95,124.125 188.95,120.375 186.833,118.258 185.342,118.258 184.225,117.141 C47.2@184.225,115.625 184.225,112.325 R70.1@184.5,112.05 184.7,112.05 185.675,111.075 185.675,109.052 187.627,107.1 201.313,107.1 211.713,117.5 J36.9@212.875,117.5
TEMPG_AI_C_IB: C46.2 J36.7 R69.1 U2.13 U5.5 | length 69.1
  Top Layer w0.4: U5.5@185.275,124.37 185.395,124.25 v1(187.325,124.25) 187.325,124.025 188.35,123 188.35,120.624 186.584,118.858 185.094,118.858 183.386,117.15 C46.2@183.25,117.15 183.25,113.225 R69.1@182.175,112.15 183.15,111.175 183.15,108.1 184.82,106.43 201.492,106.43 211.062,116 J36.7@212.875,116 ; U2.13@194.3,124.925 195.456,124.925 196.125,125.594 v1(196.125,126.1)
  Bottom Layer w0.4: v1(187.325,124.25) 194.275,124.25 v1(196.125,126.1)
TEMPH_AI_C_IB: C45.2 J36.5 R68.1 U2.14 U5.6 | length 71.8
  Top Layer w0.4: U5.6@185.275,123.1 186.075,123.1 v1(187.025,122.15) 187.025,120.15 186.333,119.458 184.575,119.458 184.167,119.05 182.134,119.05 180.4,117.316 C45.2@180.4,115.625 180.4,112.975 R68.1@179.725,112.3 181.075,110.95 181.075,107.875 183.12,105.83 201.741,105.83 210.411,114.5 J36.5@212.875,114.5 ; U2.14@194.3,124.275 195.254,124.275 195.304,124.225 196.029,124.225 v1(196.335,124.531)
  Bottom Layer w0.4: v1(187.025,122.15) 193.338,122.15 195.554,124.366 196.176,124.366 196.635,124.825 196.341,124.531 v1(196.335,124.531)
TEMPJ_AI_C_IB: C44.2 J36.3 R67.1 U2.15 U5.14 | length 86.2
  Top Layer w0.4: v1(180.359,118.756) 180.231,118.756 179.25,117.775 C44.2@179.25,117.15 179.25,114.35 R67.1@177.05,112.15 178.625,110.575 178.625,108.6 182.295,104.93 v1(199.56,104.93) ; v1(188.925,126.85) U5.14@190.725,126.85 ; U5.14@190.725,126.91 U5.14@190.785,126.85 ; U2.15@194.3,123.625 195.65,123.625 v1(196.125,123.15) ; v1(210.425,112.9) 210.525,113 J36.3@212.875,113
  Bottom Layer w0.4: v1(180.359,118.756) 189.43,118.756 192.225,121.55 193.587,121.55 195.187,123.15 v1(196.125,123.15) 196.226,123.15 197.235,124.158 197.235,126.263 195.723,127.775 189.85,127.775 v1(188.925,126.85) ; v1@199.55,104.9 199.55,105.475 206.975,112.9 v1(210.425,112.9)
TEMPK_AI_C_IB: C43.2 J36.1 R66.1 U2.12 U5.13 | length 78.2
  Top Layer w0.4: C43.2@176.4,115.625 v1(174.8,115.625) 173.975,114.8 R66.1@173.975,112.075 176.325,109.725 176.325,109.152 181.447,104.03 200.605,104.03 v1(201.225,104.65) ; U5.13@190.725,125.655 192.14,125.655 v1(192.26,125.535) 193.56,125.535 U2.12@193.625,125.6 ; v1(210.075,111.5) J36.1@212.875,111.5
  Bottom Layer w0.4: v1(174.8,115.625) 174.8,118.25 177.8,121.25 180.601,121.25 184.886,125.535 v1(192.26,125.535) ; v1(201.225,104.65) 201.225,106.301 206.424,111.5 v1(210.075,111.5)
TEMPL_AI_C_IB: C42.2 J36.23 R65.1 U2.1 U5.12 | length 39.3
  Top Layer w0.3: U5.12@190.725,124.37 191.255,124.37 195.375,120.25 198.095,120.25 v1@199.58,121.735 ; C42.2@199.625,115.6 200.7,116.675 200.7,120.615 v1@199.58,121.735 ; U2.1@200.55,122.975 U2.1@200.05,122.975 200.05,122.275 v1(199.545,121.77) v1@199.58,121.735 ; v1(202.185,126.781) 204.954,129.55 209.4,129.55 R65.1@210.15,128.8 210.15,128.025 210.125,128 J36.23@212.875,128
  Bottom Layer w0.3: v1(199.545,121.77) 199.545,124.247 202.079,126.781 v1(202.185,126.781)
TEMPM_AI_C_IB: C2.2 J36.19 R2.1 U2.5 U5.11 | length 56.8
  Top Layer w0.4: U5.11@190.725,123.1 191.649,123.1 194.9,119.849 ; v1(199.435,119.256) 197.405,119.256 196.961,119.7 195.049,119.7 194.9,119.849 ; U2.5@200.05,125.575 v1(202.075,125.575) ; v1(209.575,119.65) 207.579,117.654 207.524,117.709 207.026,117.709 206.948,117.631 206.314,117.631 205.435,116.752 205.435,116.324 201.361,112.25 197.225,112.25 194.9,114.575 C2.2@194.9,118.675 194.9,119.849 ; R2.1@210.15,125.675 211.125,125.675 211.8,125 J36.19@212.875,125 214.95,125 v1(214.975,125.025)
  Bottom Layer w0.4: v1(199.435,119.256) 199.435,119.965 199.425,119.975 199.425,120.375 202.075,123.025 v1(202.075,125.575) ; v1(209.575,119.65) 214.95,125.025 v1(214.975,125.025)
VREF1: C36.2 U7.35 | length 4.5
  Top Layer w0.3: U7.35@171.575,137.7 174.35,137.7
  Top Layer w0.4: 174.35,137.7 C36.2@175.95,137.7 ; C36.2@175.875,137.7 C36.2@175.95,137.625
VREF2: C35.2 R16.1 U7.34 | length 32.3
  Top Layer w0.3: 169.675,137.2 U7.34@171.575,137.2 173.325,137.2 173.9,136.625
  Top Layer w0.4: 173.9,136.625 174.425,136.1 C35.2@175.95,136.1
  Top Layer w0.5: R16.1@159,116.475 159.025,116.5 159.025,119.6 160.1,120.675 160.1,123.054 163.512,126.466 163.512,130.262 165.55,132.3 165.55,133.875 168.875,137.2 169.675,137.2
VREF2_BUF: R1.2 R2.2 R8.2 R9.2 R10.2 R11.2 R12.2 R13.2 R23.2 R65.2 R66.2 R67.2 R68.2 R69.2 R70.2 U4.1 | length 127.4
  Top Layer w0.4: R23.2@150.025,106.5 150.325,106.2 152.475,106.2 153.45,105.225 U4.1@154.25,105.225
  Top Layer w0.5: R23.2@150.025,106.5 150.025,103.45 153.075,100.4 167.625,100.4 172.4,105.175 170.95,106.625 170.95,108 170.95,110.35 ; v1(175.25,109.025) 173.975,110.3 R66.2@173.975,110.425 171.025,110.425 170.95,110.35 ; R67.2@177.05,110.5 177.725,109.825 v1(177.725,109.025) ; v1(179.725,109.125) R68.2@179.725,110.65 ; R1.2@181.525,119.975 179.069,119.975 178.219,119.125 177.29,119.125 176,117.835 176,117 v1(175.925,116.925) 174.725,116.925 170.95,113.15 170.95,112.575 170.95,110.35 ; v1(182.175,109.025) R69.2@182.175,110.5 ; v1(184.5,109.05) R70.2@184.5,110.4 ; v1(186.95,109.05) R8.2@186.95,110.25 ; v1(200.325,114.375) 200.9,114.375 201.775,115.25 ; R13.2@201.8,118.1 201.775,118.075 201.775,115.25 ; R65.2@208.475,128.775 R12.2@208.475,127.2 R11.2@208.475,124.125 R10.2@208.475,122.575 R9.2@208.475,120.975 207.475,120.975 204.185,117.685 204.185,116.842 202.594,115.25 201.775,115.25
  Bottom Layer w0.5: v1(175.25,109.025) v1(177.725,109.025) v1(182.175,109.025) 186.925,109.025 v1(186.95,109.05) ; v1(175.925,116.925) 177.425,115.425 191.9,115.425 192.95,114.375 v1(200.325,114.375)
pads on no net: J25.0 J35.16 L2.2 L2.4 L2.5 L2.7 L2.12 L2.13 U1.6 U7.29 U7.39 U7.43 U7.44

## Polygon pours and split planes (outlines as drawn)
GND on Bottom Layer "Ground" (solid, remove dead copper, pour order 3): 147.5,100.35 166.3,100.35 166.3,101.75 219.975,102.877 219.975,130.175 201.825,130.175 197.059,135.384 191.45,140.992 191.45,152.675 149.725,152.675 147.55,150.5 147.5,117.75

## Keep-outs
Keep-Out Layer:
  circle w0.1: c105,148 r5
  circle w0.1: c105,105 r5
  circle w0.1: c209,148 r5
  circle w0.1: c209,105 r5

## Other copper
Top Layer:
  rectangle net C1_1: 119.475,101.25 125,105.075
  rectangle net C2_1: 119.475,105.525 125.075,109.35
  rectangle net C4_1: 119.525,114.175 125.125,118
  rectangle net C3_1: 119.525,109.925 125.125,113.75
  rectangle net C5_1: 119.525,118.425 125.125,122.25
  rectangle net C6_1: 119.525,122.675 125.125,126.5
  rectangle net C7_1: 119.525,126.925 125.125,130.75
  rectangle net C8_1: 119.525,131.175 125.125,135
  rectangle net C9_1: 119.525,135.425 125.125,139.25
  rectangle net C10_1: 119.525,139.675 125.125,143.5
  rectangle net C12_1: 119.55,148.175 125.15,152
  rectangle net C11_1: 119.525,143.925 125.125,147.75
  rectangle net C12_2: 129.25,148.1 133.55,152.05
  rectangle net C11_2: 129.225,143.85 133.525,147.85
  rectangle net C10_2: 129.225,139.6 133.525,143.6
  rectangle net C9_2: 129.225,135.35 133.525,139.35
  rectangle net C8_2: 129.225,131.1 133.525,135.1
  rectangle net C7_2: 129.225,126.85 133.525,130.85
  rectangle net C6_2: 129.225,122.6 133.525,126.6
  rectangle net C5_2: 129.225,118.35 133.525,122.35
  rectangle net C3_2: 129.225,109.85 133.525,113.85
  rectangle net C4_2: 129.225,114.1 133.525,118.1
  rectangle net C2_2: 129.175,105.45 133.475,109.45
  rectangle net C1_2: 129.1,101.175 133.4,105.175
  rectangle net CELL12_AI_V_IB: 134.15,150.275 139.225,152.075
  rectangle net NetQ3_G: 134.15,147.9 138.8,149.9
  rectangle net NetQ4_G: 134.1,143.65 138.75,145.65
  rectangle net C12_1: 134.1,146.025 139.175,147.5
  rectangle net C11_1: 134.1,141.775 139.175,143.25
  rectangle net NetQ5_G: 134.1,139.4 138.75,141.4
  rectangle net C10_1: 134.1,137.525 139.175,139
  rectangle net NetQ6_G: 134.1,135.15 138.75,137.15
  rectangle net C9_1: 134.1,133.275 139.175,134.75
  rectangle net NetQ7_G: 134.1,130.9 138.75,132.9
  rectangle net C8_1: 134.1,129.025 139.175,130.5
  rectangle net NetQ8_G: 134.1,126.65 138.75,128.65
  rectangle net C7_1: 134.1,124.775 139.175,126.25
  rectangle net NetQ10_G: 134.1,122.4 138.75,124.4
  rectangle net C6_1: 134.1,120.525 139.175,122
  rectangle net NetQ11_G: 134.1,118.15 138.75,120.15
  rectangle net C5_1: 134.1,116.275 139.175,117.75
  rectangle net NetQ12_G: 134.1,113.9 138.75,115.9
  rectangle net C4_1: 134.1,112.025 139.175,113.5
  rectangle net NetQ13_G: 134.1,109.65 138.75,111.65
  rectangle net C3_1: 134.05,107.625 139.125,109.1
  rectangle net NetQ14_G: 134.05,105.25 138.7,107.25
  rectangle net C2_1: 134.05,103.375 139.125,104.85
  rectangle net NetQ15_G: 134.05,101 138.7,103
  rectangle net NetC30_2: 174.55,143.9 183.275,149.85
  rectangle net CELL12_POWER: 153.1,150.05 160.025,152.625
  rectangle net NetC30_2: 161.375,150.625 167.9,152.65
  rectangle net NetC30_2: 161.375,149.75 163.95,150.625
Bottom Layer:
  rectangle net NetC30_2: 174.725,143.9 183.275,149.85

## Silkscreen, mask and mechanical layers (free items; w line width, h text height)
Top Overlay:
  region: 182.825,106.589 182.825,106.572 182.808,106.572 182.808,106.589 182.808,106.606 182.825,106.606
  text "isoSPI MCU" at 175.35,104.175 h1.2
  text "SEP 2017" at 188.1,104.15 h1.2
  text "GWC-MCU-002-A" at 175.1,101.5 h1.2
Mechanical 2:
  the board outline again, w0.1
Mechanical 4:
  lines w7: 196.35,153.8 196.35,140.275 199.2,137.425 203.025,133.6 221.125,133.6